# Allegro board F12-F018_MAIN_V1.brd
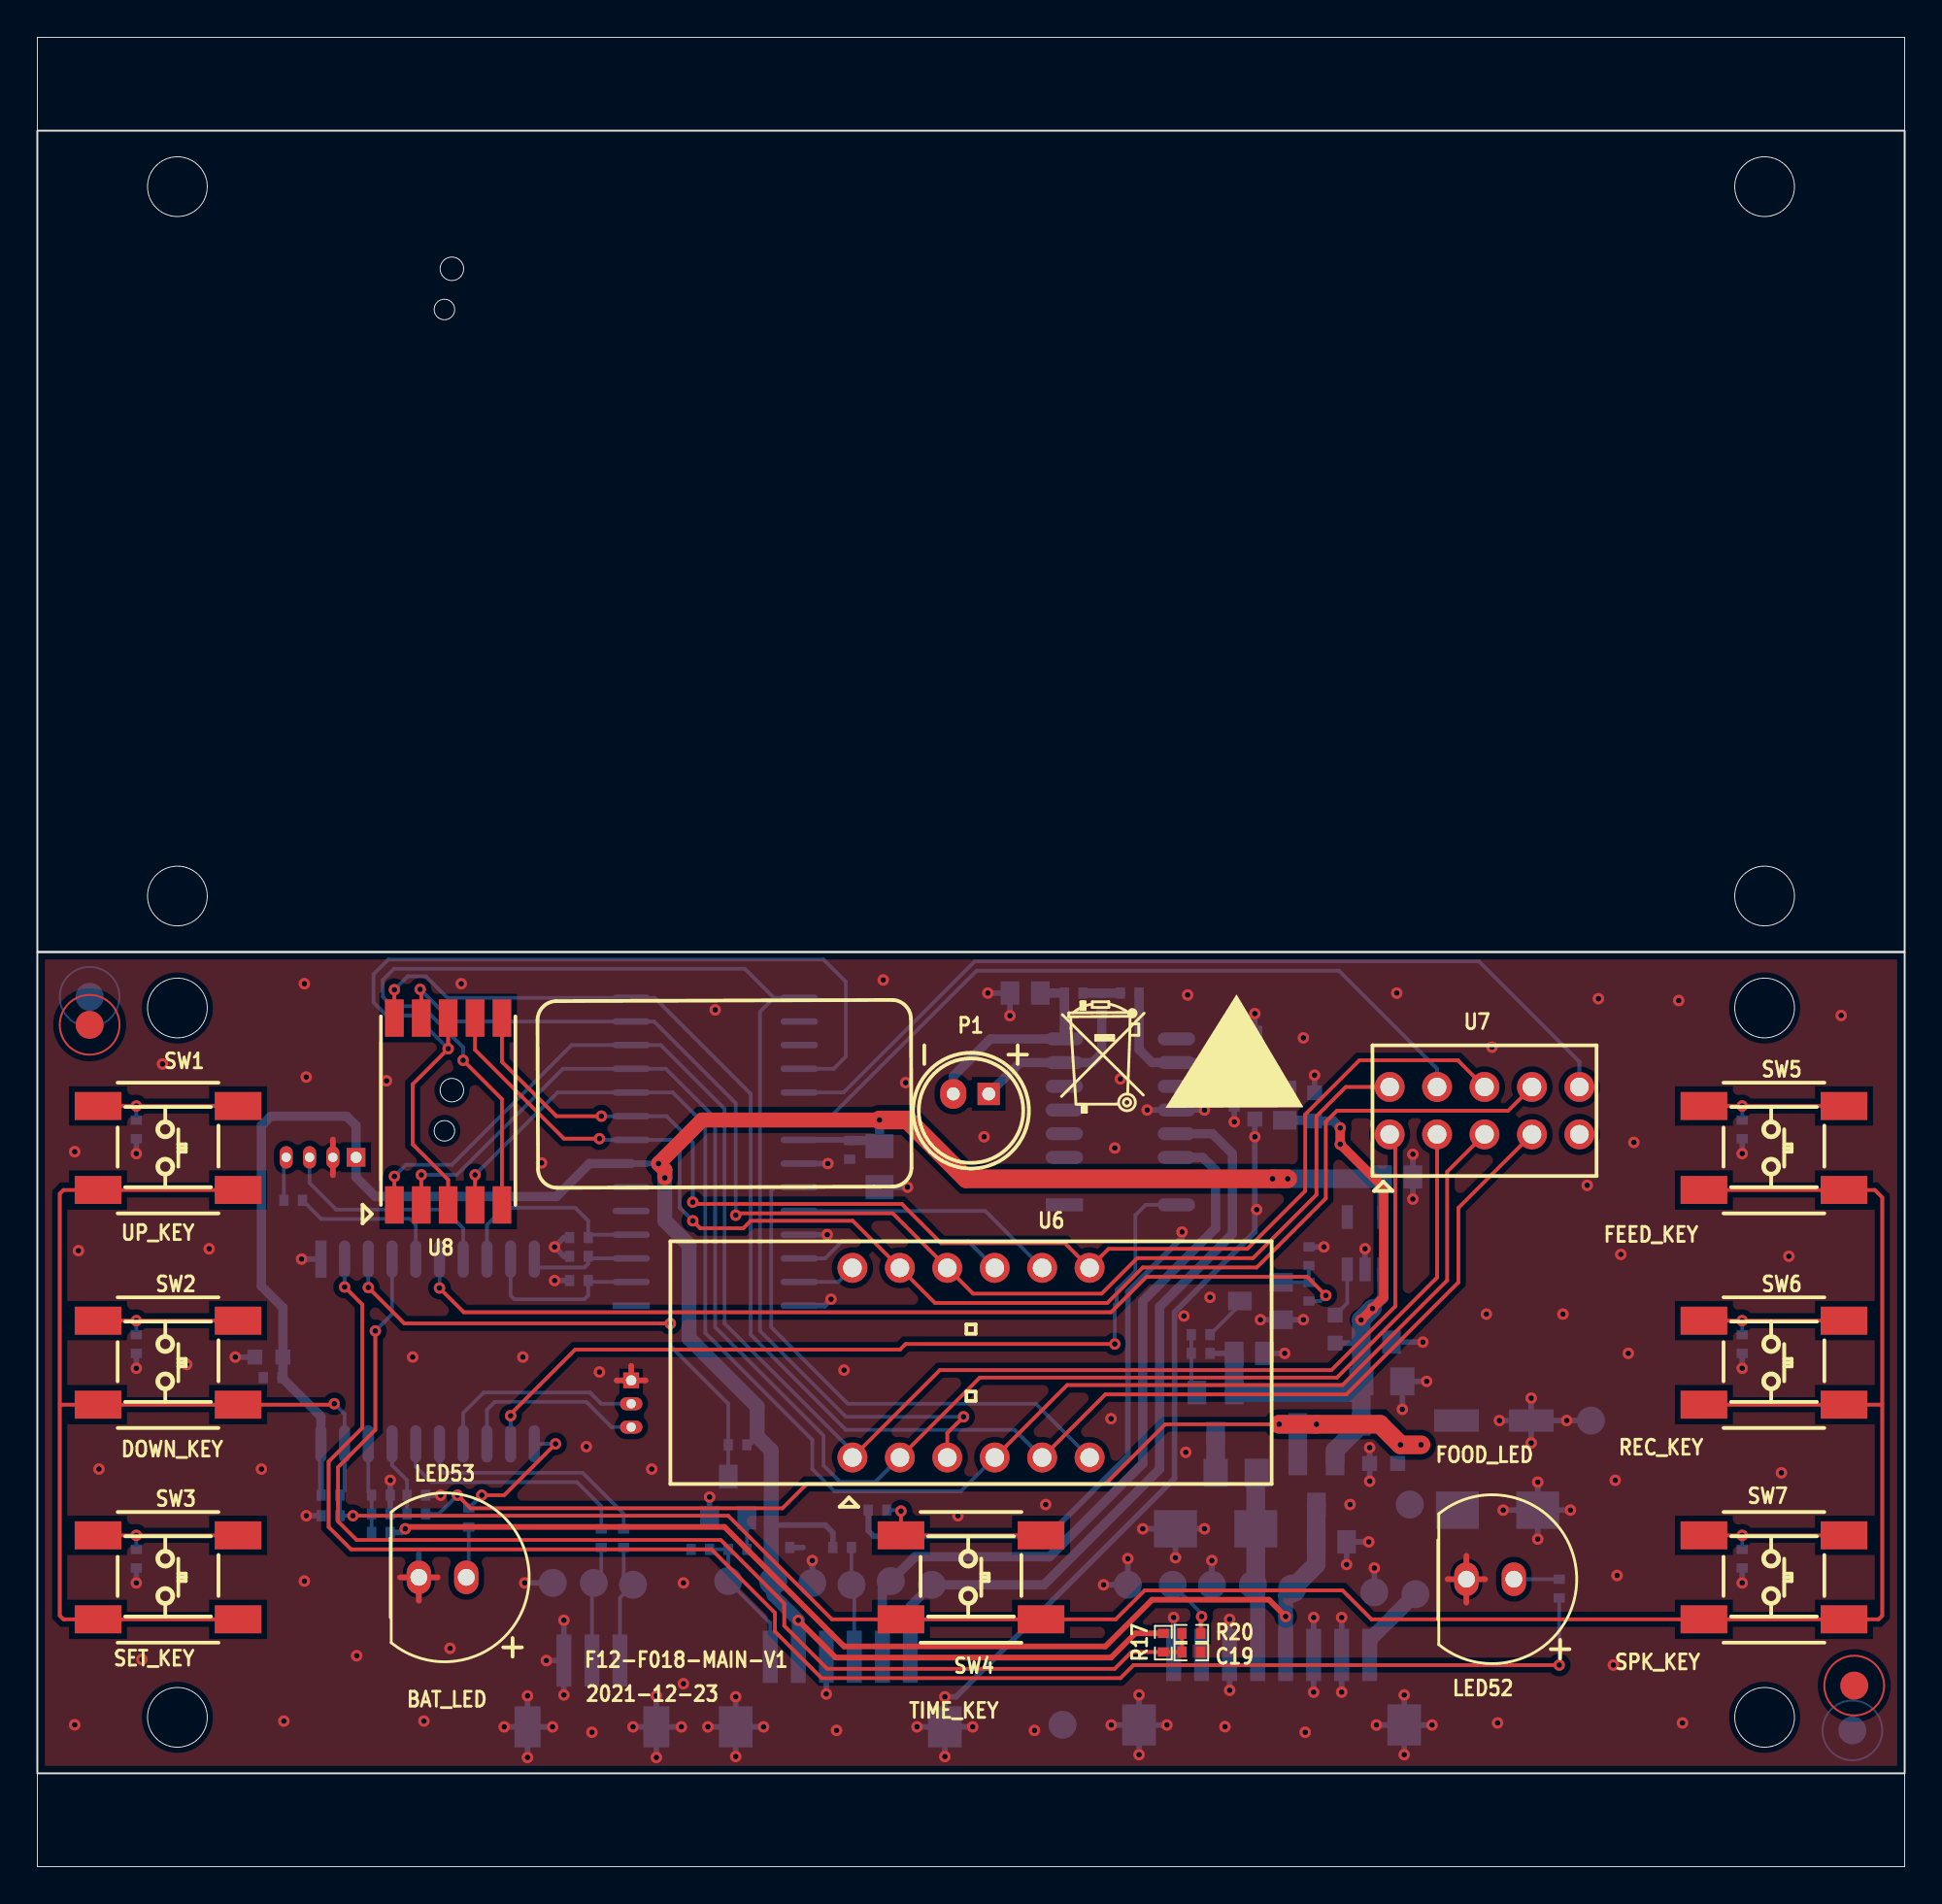
[diagram p0: board, top side]
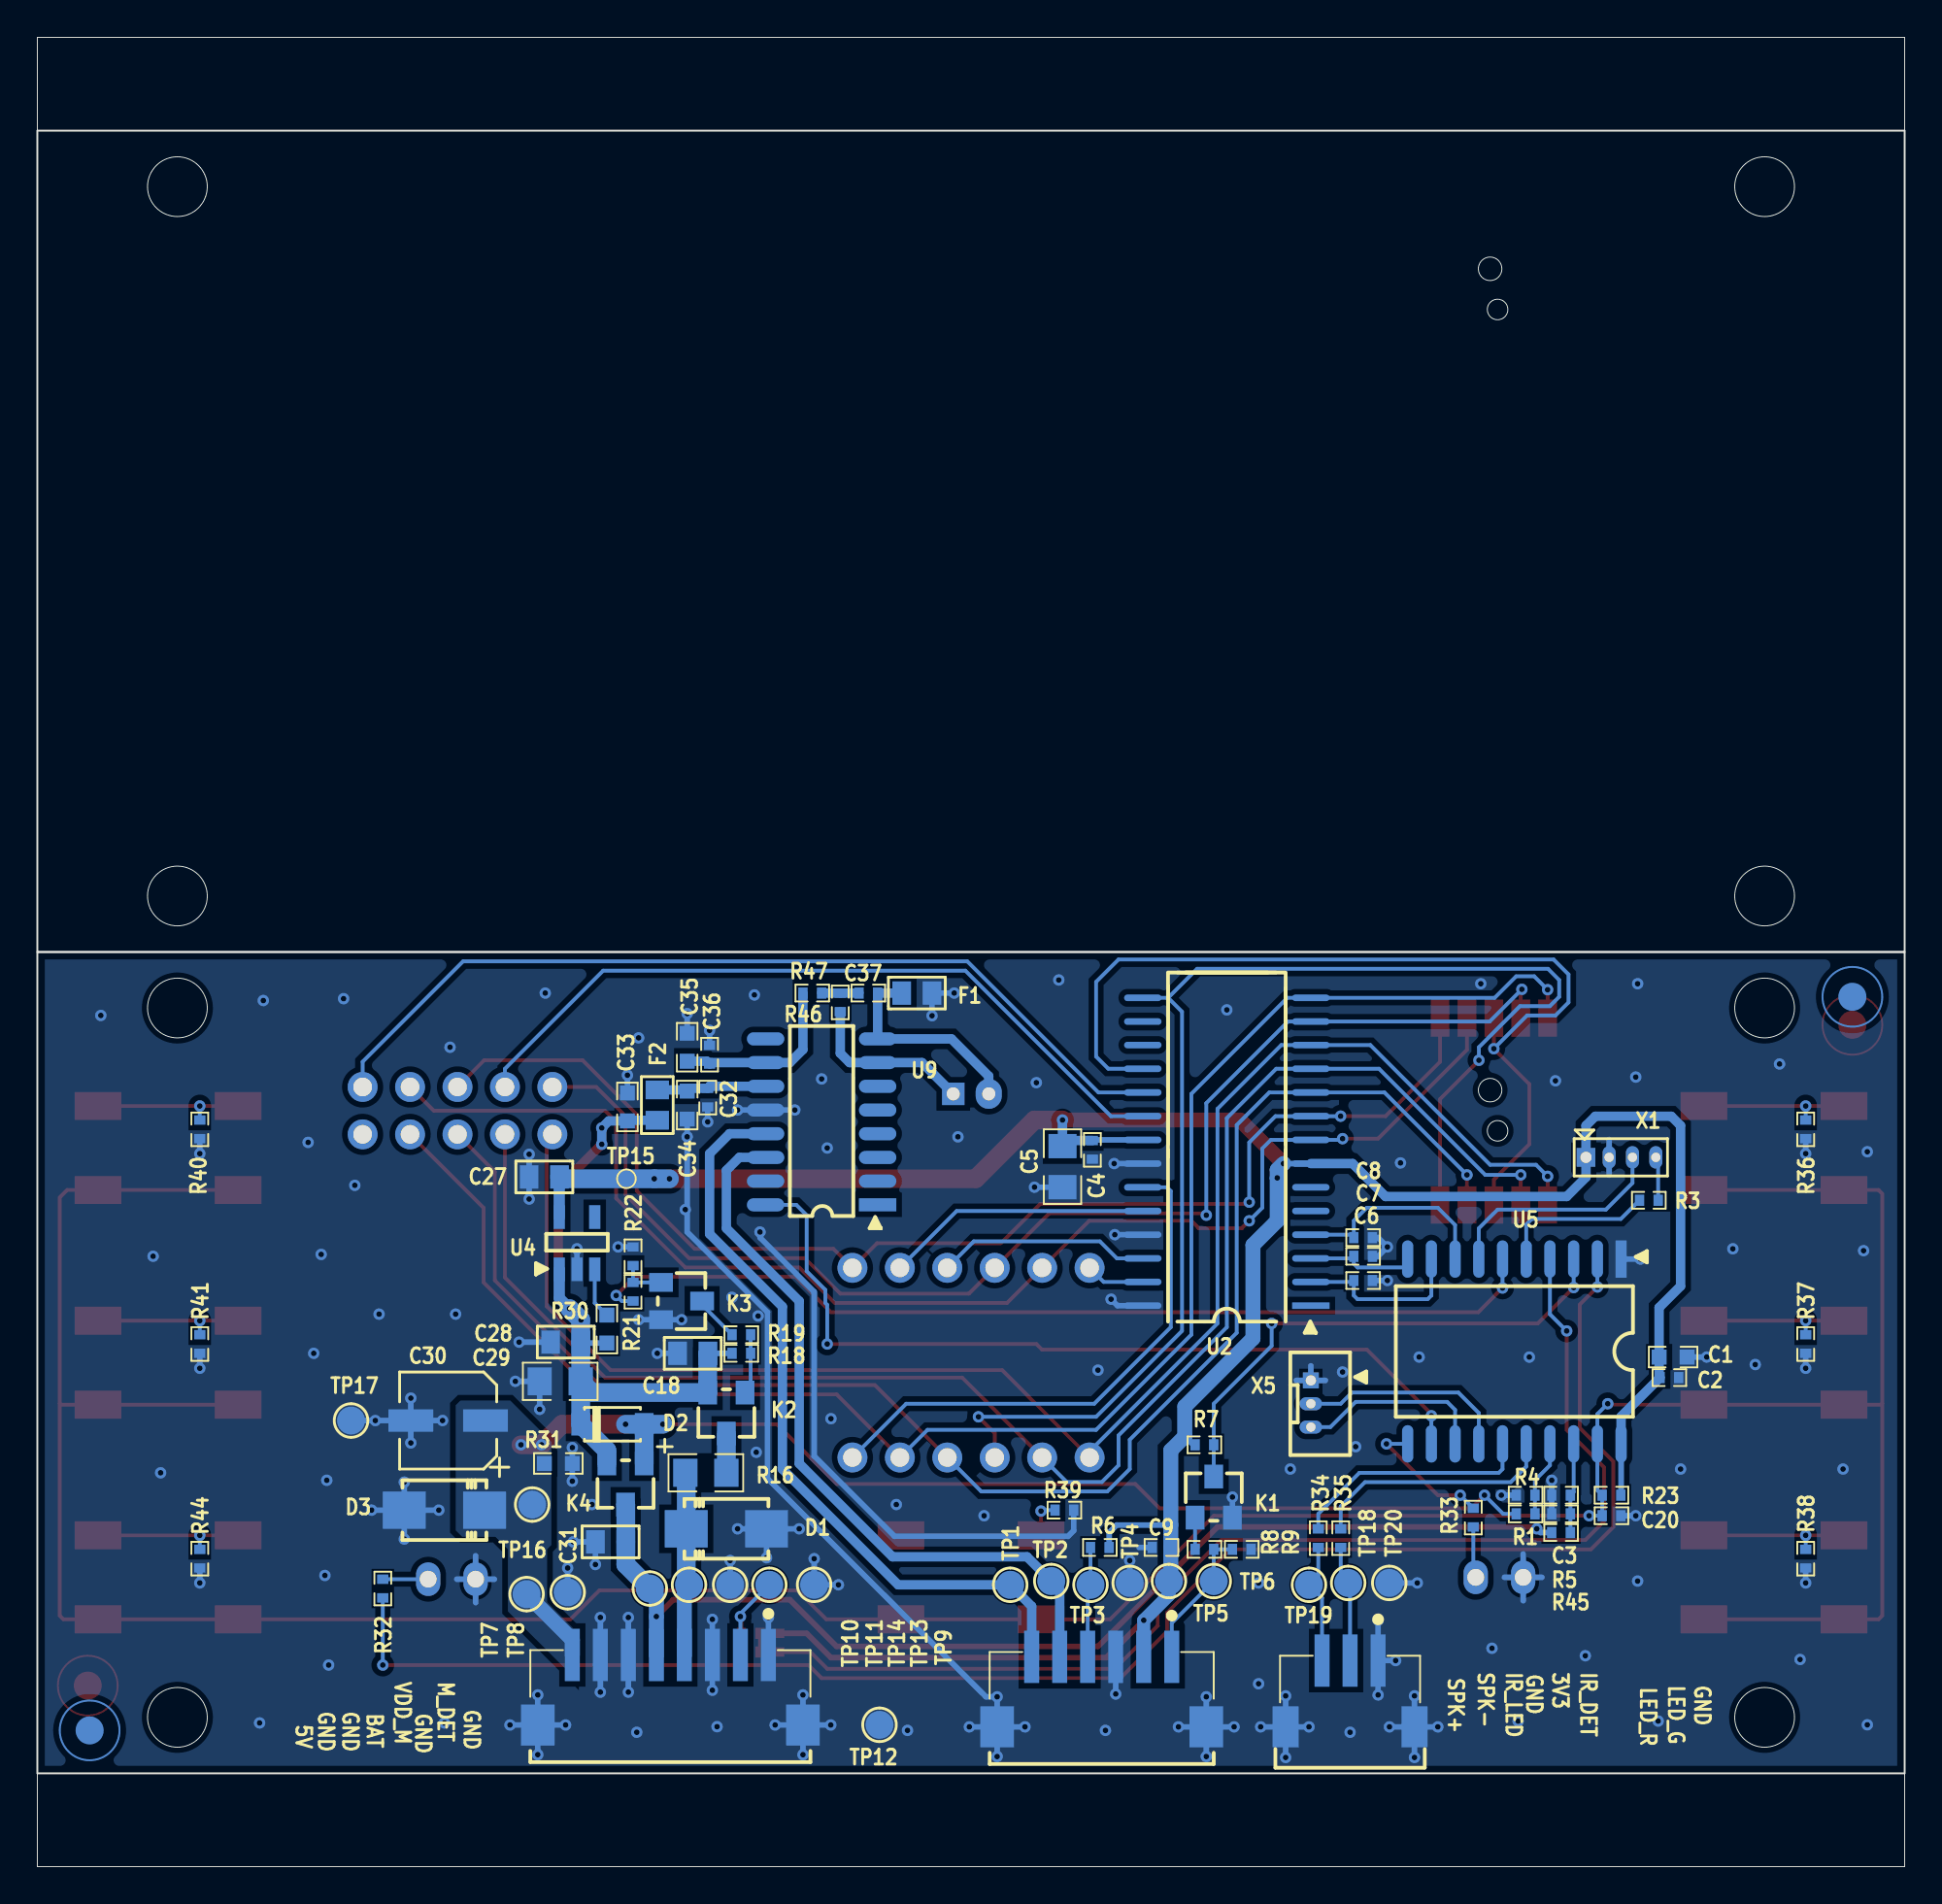
[diagram p1: board, bottom side, seen from below]

Outline 100 x 98 mm; copper layers: TOP, BOTTOM. Coordinates in mm from the lower left corner of the outline.
Outline path: rectangle 0,49 100,93 ; rectangle 0,5 100,49 ; circle c7.5,90 r1.6 ; circle c7.5,52 r1.6 ; circle c7.5,46 r1.6 ; circle c7.5,8 r1.6 ; circle c21.8,83.42 r0.55 ; circle c22.2,85.6 r0.63 ; circle c92.5,90 r1.6 ; circle c92.5,52 r1.6 ; circle c92.5,46 r1.6 ; circle c92.5,8 r1.6 ; 0,98 0,93 100,93 100,98 0,98 ; 0,5 0,0 100,0 100,5 0,5

## Placement (name value [footprint] x y rotation side)
C1  10uF_6.3V  [0603]  12.4 27.3 0 bottom
C2  0.1uF_10V  [0402]  12.6 26.2 0 bottom
C3  0.1uF_10V  [0402]  18.4 19.9 180 bottom
C4  0.1uF_10V  [0402]  43.5 38.4 90 bottom
C5  47uF_6.3V  [1206]  45.1 37.5 90 bottom
C6  0.1uF_10V  [0402]  29 31.4 0 bottom
C7  0.1uF_10V  [0402]  29 32.7 0 bottom
C8  0.1uF_10V  [0402]  29 33.7 0 bottom
C9  0.1uF_10V  [0402]  39.8 17.1 180 bottom
C18  NC/10uF_16V  [0805]  64.9 27.5 180 bottom
C19  0.1uF_10V  [0402]  61.8 11.5 180 top
C20  NC/0.1uF_10V  [0402]  15.7 18.8 0 bottom
C27  22uF_6.3V  [0805]  72.85 36.95 180 bottom
C28  22uF_6.3V  [0805]  71.7 28.1 180 bottom
C29  NC/22uF_10V  [1206]  72 26 180 bottom
C30  100uF_10V  [CPSM_5R00_5X5]  78 23.9 0 bottom
C31  22uF_10V  [0805]  69.3 17.4 180 bottom
C32  1uF_6.3V  [0402]  64.1 41.2 270 bottom
C33  10uF_6.3V  [0603]  68.4 40.7 270 bottom
C34  10uF_6.3V  [0603]  65.2 40.8 90 bottom
C35  10uF_6.3V  [0603]  65.2 43.9 270 bottom
C36  1uF_6.3V  [0402]  64 43.5 90 bottom
C37  1uF_6.3V  [0402]  55.5 46.8 180 bottom
D1  NC/SS14  [SMA_MBRA340]  63.1 18.1 0 bottom
D2  DS22W  [SOD_123LF]  69.2 23.7 0 bottom
D3  SMAJ7.5A  [SMA_MBRA340]  78.2 19.1 180 bottom
F1  1000R_0.8A  [0805]  52.9 46.8 0 bottom
F2  1000R_0.8A  [0805]  66.8 40.8 270 bottom
K1  MMBT3904_NL  [SOT23Q]  37 19.8 270 bottom
K2  SI2305-PMOS  [SOT23M]  63.1 24.3 90 bottom
K3  MMBT3904_NL  [SOT23Q]  65.5 30.3 0 bottom
K4  SI2305-PMOS  [SOT23M]  68.5 20.5 90 bottom
LED52  RED_F8  [LED_2R54_8]  77.8 15.4 180 top
LED53  Yellow_F8  [LED_2R54_8]  21.7 15.5 180 top
MK1  MARK  [MARK_PCB]  97.3 9.7 90 top
MK2  MARK  [MARK_PCB]  2.8 45.1 0 top
NOREF  -  []  64.1 43.7 0.2 top
NOREF#2  -  []  0 5 90 top
NOREF#3  -  []  36.8 41.4 0.2 top
NOREF#4  -  []  0 0 90 top
NOREF#5  -  []  0 0 0 top
NOREF#6  -  []  59.6 43.5 0.2 top
NOREF#7  -  [unnamed#2]  2.8 46.6 180 bottom
NOREF#8  -  [unnamed#2]  97.2 7.3 180 bottom
P1  -42dB_MIC_6027  [MICROPHONE_2L_1R90_6R0_N]  50 40.5 90 top
R1  510K  [0402]  20.3 18.9 0 bottom
R3  100R  [0402]  13.7 35.7 0 bottom
R4  1M  [0402]  20.3 19.9 180 bottom
R5  1M  [0402]  18.4 18.9 180 bottom
R6  1K  [0402]  43.1 17.1 0 bottom
R7  10K  [0402]  37.5 22.6 0 bottom
R8  1K  [0402]  37.5 17 0 bottom
R9  10K  [0402]  35.5 17 0 bottom
R16  1R5  [1206]  64.2 21.1 0 bottom
R17  10K  [0402]  60.3 12 90 top
R18  10K  [0402]  62.3 27.5 0 bottom
R19  1K  [0402]  62.3 28.5 180 bottom
R20  100R  [0402]  61.8 12.5 0 top
R21  1K  [0402]  68.1 30.8 270 bottom
R22  10K  [0402]  68.1 32.7 270 bottom
R23  10K  [0402]  15.7 19.9 0 bottom
R30  10K  [0603]  69.5 28.8 270 bottom
R31  470K  [0603]  72.1 21.6 0 bottom
R32  1K  [0402]  81.5 14.9 90 bottom
R33  1K  [0402]  23.1 18.7 270 bottom
R34  1K  [0402]  31.4 17.6 270 bottom
R35  1K  [0402]  30.2 17.6 270 bottom
R36  20K  [0402]  5.3 39.5 90 bottom
R37  33K  [0402]  5.3 28 270 bottom
R38  47K  [0402]  5.3 16.5 270 bottom
R39  56K  [0402]  45 19.1 180 bottom
R40  62K  [0402]  91.3 39.5 270 bottom
R41  75K  [0402]  91.3 28 270 bottom
R44  100K  [0402]  91.3 16.5 270 bottom
R45  510K  [0402]  18.4 17.9 0 bottom
R46  1K  [0402]  57 46.3 90 bottom
R47  NC/1K  [0402]  58.5 46.8 0 bottom
SW1  SW_Top_6R6x5R0  [SW4SM_6R6X6]  7 38.5 0 top
SW2  SW_Top_6R6x5R0  [SW4SM_6R6X6]  7 27 0 top
SW3  SW_Top_6R6x5R0  [SW4SM_6R6X6]  7 15.5 0 top
SW4  SW_Top_6R6x5R0  [SW4SM_6R6X6]  50 15.5 0 top
SW5  SW_Top_6R6x5R0  [SW4SM_6R6X6]  93 38.5 0 top
SW6  SW_Top_6R6x5R0  [SW4SM_6R6X6]  93 27 0 top
SW7  SW_Top_6R6x5R0  [SW4SM_6R6X6]  93 15.5 0 top
TP1  TP  [TP1R50]  47.9 15.1 180 bottom
TP2  TP  [TP1R50]  45.7 15.3 180 bottom
TP3  TP  [TP1R50]  43.6 15.1 180 bottom
TP4  TP  [TP1R50]  41.5 15.2 180 bottom
TP5  TP  [TP1R50]  39.4 15.3 180 bottom
TP6  TP  [TP1R50]  37 15.3 180 bottom
TP7  TP  [TP1R50]  73.8 14.6 180 bottom
TP8  TP  [TP1R50]  71.6 14.7 180 bottom
TP9  TP  [TP1R50]  58.4 15.1 180 bottom
TP10  TP  [TP1R50]  67.2 14.9 180 bottom
TP11  TP  [TP1R50]  65.1 15.1 180 bottom
TP12  TP  [TP1R50]  54.9 7.6 180 bottom
TP13  TP  [TP1R50]  60.8 15.1 180 bottom
TP14  TP  [TP1R50]  62.9 15.1 180 bottom
TP15  TP  [TP0R80]  68.45 36.85 180 bottom
TP16  TP  [TP1R50]  73.5 19.4 180 bottom
TP17  TP  [TP1R50]  83.2 23.9 180 bottom
TP18  TP  [TP1R50]  29.8 15.2 180 bottom
TP19  TP  [TP1R50]  31.9 15.1 180 bottom
TP20  TP  [TP1R50]  27.6 15.2 180 bottom
U2  TM1628A  [SOP28_1R27_9R00]  36.3 38.3 90 bottom
U4  LN1152A332MR  [SOT23_5L_0R95]  71.1 33.4 180 bottom
U5  HT66F018-SOP20  [SO20_10R30]  20.9 27.6 0 bottom
U6  -  [LH-3041-AW]  50 27 0 top
U7  -  [LH-2251-AW]  77.5 40.5 0 top
U8  -  [LH-2011SMD-AW]  22 40.5 0 top
U9  NVF04M  [SO16_6R00]  58 39.9 90 bottom
X1  NC/4pin_1R25_V  [CN4_1R25]  15.2 38 180 bottom
X2  3pin_1R5_H  [CN3SM_1R50]  31.2 8.3 0 bottom
X3  6pin_1R5_H  [CN6SM_1R50]  43 8.5 0 bottom
X4  8pin_1R5_H  [CN8SM_1R50]  66.1 8.6 0 bottom
X5  NC/3pin_1R25_V  [CN3S_1R25]  31.8 24.8 270 bottom

## Library data of the parts
C1-C9 C18-C20 C27-C29 C31-C37 = CAP
C30 = ELECTRO1
D1-D3 = DIODE
F1 F2 = FERRITE_BEAD
K1 K3 = NPN
K2 K4 = MOSFET_P
LED52 LED53 = LED
MK1 MK2 = MARK
P1 = MIC_6X5MM
R1 R3-R9 R16-R23 R30-R41 R44-R47 = RES
SW1-SW7 = SW_FTE-2C-V
TP1-TP20 = TP
U2 = TM1628A
U4 = FH6120M5
U5 = HT66F018-SOP20
U6 = LH-3041-AW
U7 = LH-2251-AW
U8 = LH-2011SMD-AW
U9 = NVF04M
X1 = CON4
X2 = CON3SM
X3 = CON6SM
X4 = CON8SM
X5 = CON3

## Footprints (pads in the part's own frame, mm; a bottom-side part is the same pattern mirrored in y, then rotated)
0402
  rect 0.5x0.6 smd: 1(-0.5,0) 2(0.5,0)
0603
  rect 0.8x0.8 smd: 1(-0.75,0) 2(0.75,0)
0805
  rect 1x1.25 smd: 1(-0.813,0) 2(0.813,0)
1206
  rect 1.3x1.5 smd: 1(-1.1,0) 2(1.1,0)
CN3S_1R25
  rect 0.85x0.85 hole 0.55: 1(-1.25,0)
  oval 0.7x1.2 hole 0.5: 2(0,0) 3(1.25,0)
CN3SM_1R50
  rect 0.8x2.799 smd: 1(-3,-2.741) 2(-1.501,-2.741) 3(0,-2.741)
  rect 1.4x2.2 smd: 4(1.95,0.81) 5(-4.95,0.81)
CN4_1R25
  rect 1x1 hole 0.6: 1(-1.865,0)
  oval 0.7x1.2 hole 0.5: 2(-0.625,0) 3(0.625,0) 4(1.875,0)
CN6SM_1R50
  rect 0.8x2.799 smd: 1(-3.75,-2.741) 2(-2.251,-2.741) 3(-0.75,-2.741) 4(0.751,-2.741) 5(2.25,-2.741) 6(3.75,-2.741)
  rect 1.8x2.2 smd: 7(5.6,1.01) 8(-5.6,1.01)
CN8SM_1R50
  rect 0.8x2.799 smd: 1(-5.25,-2.741) 2(-3.751,-2.741) 3(-2.25,-2.741) 4(-0.749,-2.741) 5(0.75,-2.741) 6(2.25,-2.741) 7(3.75,-2.741) 8(5.25,-2.741)
  rect 1.8x2.2 smd: 9(7.1,1.01) 10(-7.1,1.01)
CPSM_5R00_5X5
  rect 2.4x1.2 smd: 1(-2,0) 2(2,0)
LED_2R54_8
  oval 1.3x1.8 hole 0.9: 1(-1.27,0) 2(1.27,0)
LH-2011SMD-AW
  rect 1x2 smd: 1(-2.88,-5.05) 2(-1.44,-5.05) 3(0,-5.05) 4(1.44,-5.05) 5(2.88,-5.05) 6(2.88,4.96) 7(1.44,4.96) 8(0,4.96) 9(-1.44,4.96) 10(-2.88,4.96)
LH-2251-AW
  round 1.6 hole 1: 1(-5.08,-1.27) 2(-2.54,-1.27) 3(0,-1.27) 4(2.54,-1.27) 5(5.08,-1.27) 6(5.08,1.27) 7(2.54,1.27) 8(0,1.27) 9(-2.54,1.27) 10(-5.08,1.27)
LH-3041-AW
  round 1.6 hole 1: 1(-6.35,-5.08) 2(-3.81,-5.08) 3(-1.27,-5.08) 4(1.27,-5.08) 5(3.81,-5.08) 6(6.35,-5.08) 7(6.35,5.08) 8(3.81,5.08) 9(1.27,5.08) 10(-1.27,5.08) 11(-3.81,5.08) 12(-6.35,5.08)
MARK_PCB
  round 1.5 smd: 1(0,0)
MICROPHONE_2L_1R90_6R0_N
  rect 1.2x1.2 hole 0.7: 1(0.9,-0.95)
  oval 1.6x1.4 hole 0.7: 2(0.9,0.95)
SMA_MBRA340
  rect 2.3x2 smd: A(-2.15,0) K(2.15,0)
SO16_6R00
  rect 0.7x2 smd: 1(-4.445,-3)
  oval 0.7x2 smd: 2(-3.175,-3) 3(-1.905,-3) 4(-0.635,-3) 5(0.635,-3) 6(1.905,-3) 7(3.175,-3) 8(4.445,-3) 9(4.445,3) 10(3.175,3) 11(1.905,3) 12(0.635,3) 13(-0.635,3) 14(-1.905,3) 15(-3.175,3) 16(-4.445,3)
SO20_10R30
  rect 0.6x2 smd: 1(-5.715,-4.95)
  oval 0.6x2 smd: 2(-4.445,-4.95) 3(-3.175,-4.95) 4(-1.905,-4.95) 5(-0.635,-4.95) 6(0.635,-4.95) 7(1.905,-4.95) 8(3.175,-4.95) 9(4.445,-4.95) 10(5.715,-4.95) 11(5.715,4.95) 12(4.445,4.95) 13(3.175,4.95) 14(1.905,4.95) 15(0.635,4.95) 16(-0.635,4.95) 17(-1.905,4.95) 18(-3.175,4.95) 19(-4.445,4.95) 20(-5.715,4.95)
SOD_123LF
  rect 1x1.2 smd: A(-1.7,0) K(1.7,0)
SOP28_1R27_9R00
  rect 0.35x2 smd: 1(-8.245,-4.5)
  oval 0.35x2 smd: 2(-6.975,-4.5) 3(-5.715,-4.5) 4(-4.445,-4.5) 5(-3.175,-4.5) 6(-1.905,-4.5) 7(-0.635,-4.5) 8(0.635,-4.5) 9(1.905,-4.5) 10(3.175,-4.5) 11(4.445,-4.5) 12(5.715,-4.5) 13(6.975,-4.5) 14(8.245,-4.5) 15(8.245,4.5) 16(6.975,4.5) 17(5.715,4.5) 18(4.445,4.5) 19(3.175,4.5) 20(1.905,4.5) 21(0.635,4.5) 22(-0.635,4.5) 23(-1.905,4.5) 24(-3.175,4.5) 25(-4.445,4.5) 26(-5.715,4.5) 27(-6.975,4.5) 28(-8.245,4.5)
SOT23_5L_0R95
  rect 0.6x1.27 smd: 1(-0.95,-1.4) 2(0,-1.4) 3(0.95,-1.4) 4(0.95,1.4) 5(-0.95,1.4)
SOT23M
  rect 1.27x1 smd: D(-1.1,0) G(1.1,-1) S(1.1,1)
SOT23Q
  rect 1.27x1 smd: B(1.1,-1) C(-1.1,0) E(1.1,1)
SW4SM_6R6X6
  rect 2.5x1.5 smd: 1(3.75,-2.25) 2(-3.75,-2.25) 3(3.75,2.25) 4(-3.75,2.25)
TP0R80
  round 0.8 smd: 1(0,0)
TP1R50
  round 1.5 smd: 1(0,0)
unnamed#2
  round 1.5 smd: 1(0,0)

## Nets
AGND: C37.2 F1.2 P1.2(-) U9.8(AGND)
GND: C1.1 C2.1 C3.1 C4.1 C5.1 C6.1 C7.1 C8.1 C9.1 C18.1 C19.1 C20.1 C27.1 C28.1 C29.1 C30.2 C31.1 C32.2 C33.1 C34.1 C35.1 C36.2 D1.A D3.A F1.1 K1.E K3.E LED52.2 LED53.2 R4.1 R5.1 R9.1 R22.1 R31.1 R36.1 R37.2 R38.2 R39.2 R40.2 R41.2 R44.2 TP4.1 TP8.1 TP9.1 TP12.1 TP14.1 TP17.1 TP20.1 U2.22(GND2#22) U2.25(GND2#25) U2.28(GND) U4.2(GND) U5.1(VSS) U9.12(GND) X1.2 X2.1 X2.4 X2.5 X3.3 X3.7 X3.8 X4.1 X4.3 X4.6 X4.7 X4.9 X4.10 X5.1
VDD_5VDC: C30.1 D2.A D3.K K4.G R1.2 R31.2 TP7.1 TP16.1 X4.8
VDD_BAT: C31.2 K4.D R45.2 TP10.1 X4.5
VDD_MOTOR: D1.K R16.2 TP11.1 X4.4
VDD_SEL: C18.2 C28.2 C29.2 C33.2 D2.K F2.2 K2.S K4.S R18.2 R30.2 U4.1(IN)
ADC_KEY: C20.2 R23.2 SW1.1 SW1.2 SW2.1 SW2.2 SW3.1 SW3.2 SW4.1 SW4.2 SW5.1 SW5.2 SW6.1 SW6.2 SW7.1 SW7.2 U5.19(PB0/INT0/AN0/XT1)
BAT_DET: C3.2 R5.2 R45.1 U5.18(PB1/INT1/AN1/XT2)
CLK: C7.2 U2.3(CLK) U5.10(PB5/C-)
DC_DET: R1.1 R4.2 U5.17(PB2/TCK0/AN2)
DIO: C6.2 U2.2(DIO) U5.9(PB6/C+)
DSCK: U5.7(PA2/ICPCK/OCDSCK) X1.3
DSDA: R3.2 U5.5(PA0/TP0/ICPDA/OCDSDA)
F8_R_LED: R32.1 U5.2(PC0/OSC1)
F8_Y_LED: R33.1 U5.11(PB4/CLO)
GRID1: U2.27(GRID1) U6.12(DIG1)
GRID2: U2.26(GRID2) U6.9(DIG2)
GRID3: U2.24(GRID3) U6.8(DIG3)
GRID4: U2.23(GRID4) U6.6(DIG4)
GRID5: U2.20(GRID5/SEG14) U7.9(DIG1)
GRID6: U2.19(GRID6/SEG13) U7.6(DIG2)
GRID7: U2.18(GRID7/SEG12) U8.3(DIG1) U8.8(DIG2)
IR_DET: K1.C R7.1 U5.3(PC1/OSC2)
IRDA: U5.12(PB3/TP2/AN7) U9.16(PA9/PA11)
LDO_3V3: C1.2 C2.2 C4.2 C5.2 C9.2 C27.2 R6.1 R7.2 R17.2 R23.1 TP5.1 TP15.1 U2.7(VDD) U2.21(VDD2) U4.5(OUT) U5.20(VDD) X1.1 X3.2
LED_G: R35.1 U5.16(PA4/TCK1/AN3)
LED_R: R34.1 U5.15(PA5/AN4/VREF)
MIC+: P1.1(+) R46.1 U9.7(PB1)
MOTOR_DET: C19.2 R17.1 R20.1 U5.4(PC2)
MOTOR_DRIVER: R21.2 U5.6(PA1)
RXD: U5.13(PA7/TP1/AN6) X5.3
SEG1: U2.8(SEG1/KS1) U6.11(A) U7.7(A) U8.7(A)
SEG2: U2.9(SEG2/KS2) U6.7(B) U7.8(B) U8.6(B)
SEG3: U2.10(SEG3/KS3) U6.4(C) U7.3(C) U8.4(C)
SEG4: U2.11(SEG4/KS4) U6.2(D) U7.2(D) U8.2(D)
SEG5: U2.12(SEG5KS5) U6.1(E) U7.1(E) U8.1(E)
SEG6: U2.13(SEG6/KS6) U6.10(F) U7.10(F) U8.9(F)
SEG7: U2.14(SEG7/KS7) U6.5(G) U7.4(G) U8.10(G)
SEG8: U2.15(KS8/SEG8) U6.3(DP) U8.5(DP)
SPK+: TP1.1 U9.13(DACPO) X3.6
SPK-: TP2.1 U9.14(DACNO) X3.5
STB: C8.2 U2.4(STB) U5.8(PA3/CX)
TXD: U5.14(PA6/TCK2/AN5) X5.2
VOUT_3V3: C35.2 C36.1 R47.2 U9.10(VDDIO)
N17327339: R36.2 SW1.3 SW1.4
N17337672: R30.1 U4.3(EN)
N17354367: R20.2 TP13.1 X4.2
N17360659: R37.1 SW2.3 SW2.4
N17360860: R38.1 SW3.3 SW3.4
N17361075: R39.1 SW4.3 SW4.4
N17361306: R40.1 SW5.3 SW5.4
N17361550: R41.1 SW6.3 SW6.4
N17361802: R44.1 SW7.3 SW7.4
N17363842: K2.G R18.1 R19.2
N17363844: K3.C R19.1
N17363852: K2.D R16.1
N17363856: K3.B R21.1 R22.2
N17376750: R3.1 X1.4
N17379186: R34.2 TP19.1 X2.3
N17379194: R35.2 TP18.1 X2.2
N17379605: LED52.1 R32.2
N17379623: LED53.1 R33.2
N17382684: K1.B R8.2
N17382715: R8.1 R9.2 TP6.1 X3.1
N17382789: R6.2 TP3.1 X3.4
N17383671: C32.1 C34.2 F2.1 U9.11(VBAT)
N17392841: C37.1 R46.2 R47.1

Pads without a net: MK1 1; MK2 1; NOREF#7 1; NOREF#8 1; U2 1 5 6 16 17; U4 4; U7 5; U9 1 2 3 4 5 6 9 15

## Via types
v1: diameter 0.61, hole 0.305, TOP to BOTTOM, 211 vias

## Routing (per net, layer and track width the routed paths; a pad name or vN(x,y) marks a point on that pad's centre or on a via; arc(x,y) is an arc through that point)
AGND: length 11.5
  BOTTOM w0.5: F1.2 C37.2 U9.8 51.05,44.34 49.05,42.35 P1.2
GND: length 224.3
  TOP w0.3: 75.53,15.4 LED52.2 ; LED52.2 77.53,15.4 ; LED52.2 76.53,16.65 ; LED52.2 76.53,14.15 ; 20.43,14.25 LED53.2 ; LED53.2 19.43,15.5 ; LED53.2 21.43,15.5 ; 15.82,37.05 X1.2 15.82,38.95 ; X5.1 32.58,26.05 ; X5.1 31.8,26.83 ; X5.1 31.02,26.05
  BOTTOM w0.3: 40.8,33.86 v1(42.3,33.86) ; v1(65.5,29.3) K3.E v1(67.8,29.3) ; R4.1 v1(21.6,19.9) ; X5.1 32.58,26.05 ; X5.1 31.02,26.05 ; X5.1 31.8,26.83 ; v1(71.3,17.4) C31.1 v1(70.11,16.19) ; 76.53,14.15 LED52.2 ; LED52.2 76.53,16.65 ; LED52.2 77.53,15.4 ; LED52.2 75.53,15.4 ; v1(69.85,13.35) X4.7 v1(69.85,9.35) ; X4.9 v1(74.69,7.59) ; X4.9 v1(71.71,7.59) ; X4.9 v1(73.2,6) ; X4.9 v1(73.2,9.2) ; v1(58.4,16.5) TP9.1 v1(57.1,15.1) ; LED53.2 21.43,15.5 ; LED53.2 19.43,15.5 ; LED53.2 20.43,14.25 ; LED53.2 20.43,16.75 ; TP17.1 v1(81.9,23.9) C30.2 ; C9.1 41,17.1 ; R37.2 v1(5.3,26.7) ; X2.4 v1(34.49,7.49) ; X2.4 v1(31.9,7.49) ; X2.4 v1(33.15,5.85) ; X2.4 v1(33.15,9.15) ; X2.5 v1(27.59,7.49) ; X2.5 v1(26.25,9.15) ; X2.5 v1(26.25,5.85) ; X2.5 v1(25,7.49) ; TP14.1 v1(62.9,16.4) ; D1.A v1(60.95,16.55) ; D1.A v1(62.5,18.1) ; D1.A v1(59.2,18.1) ; D3.A v1(82.1,19.1) ; D3.A v1(80.35,20.6) ; D3.A v1(80.35,17.55) ; D3.A v1(78.5,19.1) ; v1(71.35,22.45) R31.1 v1(71.35,20.65) ; X4.10 v1(60.49,7.59) ; X4.10 v1(57.51,7.59) ; X4.10 v1(59,6) ; X4.10 v1(59,9.2) ; C28.1 v1(74.2,28.1) ; C35.1 v1(65.2,45.7) ; C20.1 v1(14.4,18.8) ; v1(62.5,40.53) U9.12 v1(59.44,40.53) ; U2.22 v1(42.34,37.66) ; R5.1 C3.1 v1(18.9,20.7) ; v1(52.09,45.59) 52.09,46.8 v1(50.9,46.8) ; R40.2 v1(91.3,38.2) ; v1(61.3,34) 61.3,33.7 58.4,30.8 58.4,22 54.1,17.7 44.8,17.7 44.5,18 R39.2 ; X2.1 v1(27.26,11.04) ; X2.1 v1(28.2,9.2) ; X2.1 v1(28.2,13.2) ; TP4.1 v1(41.5,16.4) ; X3.7 v1(50.09,7.49) ; X3.7 v1(48.6,9.1) 49.2,9.1 60.9,20.8 60.9,29.7 65.2,34 v1(65.2,39.1) C34.1 ; X3.7 v1(47.11,7.49) ; X3.7 v1(48.6,5.9) ; C8.1 28.2,33.7 v1(27.7,33.2) 28.2,32.7 C7.1 ; X3.3 v1(42.25,9.25) ; R22.1 v1(68.9,33.2) ; C33.1 v1(68.4,42.4) ; C36.2 v1(64,44.8) ; U5.1 v1(14.15,32.55) ; v1(63.85,9.45) X4.3 v1(63.85,13.25) ; v1(68.35,13.35) X4.6 v1(68.35,9.35) ; X3.8 v1(38.89,7.49) ; X3.8 v1(37.4,5.9) ; X3.8 v1(37.4,9.1) ; X3.8 v1(35.91,7.49) ; v1(73.66,35.76) C27.1 v1(73.66,38.16) ; C6.1 v1(27.7,31.4) ; v1(74.4,26) C29.1 v1(73.1,24.5) ; U2.28 42.16,30.05 v1(42.5,30.4) ; C30.2 v1(80,25.1) ; C30.2 v1(78.3,23.9) ; C30.2 v1(80,22.7) ; TP8.1 v1(71.6,16) ; 15.82,38.95 X1.2 15.82,37.05 ; K1.E v1(36,19.8) ; R38.2 v1(5.3,15.2) ; R36.1 v1(5.3,38.2) ; C1.1 v1(10.6,27.3) ; TP20.1 v1(26.1,15.2) ; R41.2 v1(91.3,26.7) ; C5.1 v1(46.6,36.4) ; X4.1 v1(60.85,13.35) ; R44.2 v1(91.3,15.2) ; 65.71,27.5 v1(66.8,27.5) ; U4.2 v1(71.1,33.1) ; C32.2 v1(64.1,39.9)
  vias: v1(2,38.3) v1(2,7.6) v1(2.2,33) v1(3.3,21.3) v1(5.6,11.1) v1(6.7,43) v1(8,26.9) v1(9.2,33.1) v1(12,21.3) v1(13.2,7.8) v1(14.3,47.3) v1(14.3,15.3) v1(14.4,42.3) v1(17.1,11.3) v1(18.7,42.1) v1(20.1,27.3) v1(20.7,7.8) v1(22.1,11.7) v1(22.7,47.3) v1(26,27.3) v1(27,37.7) v1(29.4,22.5) v1(29.7,7.2) v1(30.1,26.5) v1(32.9,21.3) v1(34.6,15.2) v1(34.6,9.8) v1(36.3,45.9) v1(42.8,7.3) v1(43.2,26.6) v1(45.3,47.5) v1(46.5,42) v1(49.3,18.8) v1(50.7,39.1) v1(53.4,7.3) v1(54,19.4) v1(57.5,24) v1(57.7,38.5) v1(58,42.2) v1(61.4,29.5) v1(61.5,22.2) v1(61.6,46.7) v1(62.8,30.5) v1(63.6,7.5) v1(65.3,35.2) v1(67.8,44.4) v1(67.9,7.2) v1(70.3,19.4) v1(72.8,46.8) v1(77.6,29.6) v1(77.9,43.9) v1(78.2,7.7) v1(81.7,29.6) v1(83,36.5) v1(83.6,46.5) v1(84.4,10.8) v1(84.5,20.7) v1(84.6,15.6) v1(84.8,32.8) v1(85.2,27.5) v1(85.5,38.8) v1(87.9,46.4) v1(88.1,7.7) v1(93.4,21.1) v1(93.8,32.7) v1(96.6,45.6)
VDD_5VDC: length 64.7
  TOP w0.2: v1(22.5,19.9) 23.2,19.2 39.9,19.2 41.2,20.5 57.2,20.5 60.4,23.7 v1(66.5,23.7)
  TOP w1: v1(74.1,22.6) v1(73,22.6) 71.9,23.7 v1(68.5,23.7) v1(66.5,23.7)
  BOTTOM w0.2: R1.2 21.5,18.9 v1(22.5,19.9)
  BOTTOM w0.8: TP7.1 71.35,12.15 X4.8
  BOTTOM w1: v1(68.5,23.7) D2.A ; D2.A K4.G ; D2.A v1(66.5,23.7)
VDD_BAT: length 60.9
  TOP w0.3: v1(66.85,13.4) 65.95,14.3 59.7,14.3 57.2,11.8 43.2,11.8 36.8,18.2 19.8,18.2 v1(19.7,18.1)
  BOTTOM w0.3: R45.2 19.5,17.9 v1(19.7,18.1)
  BOTTOM w0.8: X4.5 v1(66.85,13.4) 66.85,14.55 TP10.1
  BOTTOM w1: K4.D 68.49,19.39 C31.2 68.49,16.19 TP10.1
VDD_MOTOR: length 9.9
  BOTTOM w0.8: X4.4 65.35,14.85 TP11.1
  BOTTOM w1: R16.2 65.25,21.05 D1.K 65.25,15.25 TP11.1
VDD_SEL: length 40.3
  TOP w0.5: v1(70.89,29.29) v1(71.5,29.9) 72.1,30.5 72.1,36.38 v1(69.78,38.7) v1(69.78,39.58)
  BOTTOM w0.3: R18.2 C18.2 ; R30.2 70.84,28.05 C28.2
  BOTTOM w0.5: 66.8,39.99 68.36,39.99 C33.2 69.4,39.95 v1(69.78,39.58) v1(69.78,38.7)
  BOTTOM w0.6: C28.2 v1(70.89,29.29) 70.9,29.3 ; U4.1 72.05,30.45 v1(71.5,29.9)
  BOTTOM w1: C29.2 D2.K 69.5,22.3 K4.S ; C29.2 70.3,25.4 K2.S 64.1,27.49 C18.2 ; C29.2 70.9,28.09 ; 70.9,28.09 70.9,29.3 v1(71.5,29.9) ; 70.9,28.09 C28.2
ADC_KEY: length 190.9
  TOP w0.2: 98.8,24.8 98.8,13.45 98.6,13.25 SW7.1 SW7.2 71.45,13.25 69.9,14.8 59.3,14.8 57.75,13.25 SW4.1 SW4.2 42.55,13.25 37,18.8 v1(16.9,18.8) ; 98.8,24.8 98.8,35.85 98.4,36.25 SW5.1 SW5.2 ; 98.8,24.8 98.75,24.75 SW6.1 SW6.2 ; 1.2,24.8 1.2,36.05 1.4,36.25 SW1.2 SW1.1 ; 1.2,24.8 1.2,13.45 1.4,13.25 SW3.2 SW3.1 ; 1.2,24.8 1.25,24.75 SW2.2 SW2.1 15.85,24.75 v1(15.9,24.8)
  BOTTOM w0.2: v1(16.9,18.8) C20.2 R23.2 16.45,20.16 U5.19 16.45,24.25 v1(15.9,24.8)
BAT_DET: length 4.8
  BOTTOM w0.2: U5.18 17.73,20.07 C3.2 R5.2 R45.1
CLK: length 6
  BOTTOM w0.2: U2.3 29.61,32.59 C7.2 29.5,32.3 29.3,32.1 26.82,32.1 26.61,32.3 U5.10
DC_DET: length 4.1
  BOTTOM w0.2: R1.1 R4.2 19.8,20.7 19,21.5 19,22.65
DIO: length 9.4
  BOTTOM w0.2: U2.2 29.57,31.32 C6.2 29.5,30.6 29.3,30.4 25.55,30.4 25.34,30.6 U5.9
DSCK: length 12.3
  BOTTOM w0.2: X1.3 14.57,36.62 16,35.2 21.8,35.2 22.8,34.2 U5.7
DSDA: length 8.5
  BOTTOM w0.2: U5.5 20.27,34.4 19.96,34.7 15.2,34.7 R3.2
F8_R_LED: length 89.2
  TOP w0.2: v1(16.45,31.05) 17.4,30.11 17.4,23.5 15.6,21.7 15.6,18.2 16.8,17 36.1,17 39.5,13.6 39.5,12.6 42,10.1 58,10.1 58.7,10.8 v1(81.5,10.8)
  BOTTOM w0.2: U5.2 v1(16.45,31.05) ; R32.1 v1(81.5,10.8)
F8_Y_LED: length 7.2
  TOP w0.2: v1(23.8,19.9) 25,19.9 v1(27.75,22.65)
  BOTTOM w0.2: U5.11 v1(27.75,22.65) ; R33.1 v1(23.8,19.9)
GRID1: length 3.2
  BOTTOM w0.2: U6.12 42.9,31.32 U2.27
GRID2: length 11.4
  BOTTOM w0.2: U2.26 42.19,32.59 43.1,33.5 49.85,33.5 U6.9
GRID3: length 14.3
  BOTTOM w0.2: U2.24 50.77,35.12 U6.8
GRID4: length 28.8
  BOTTOM w0.2: 40.8,36.39 39.5,36.39 39.3,36.19 39.3,28.9 43.4,24.8 53.47,24.8 U6.6
GRID5: length 40.5
  BOTTOM w0.2: U2.20 42.51,40.2 50.3,48 69.7,48 74.96,42.74 U7.9
GRID6: length 48.3
  BOTTOM w0.2: U7.6 82.58,43.12 77.2,48.5 50.2,48.5 43.17,41.48 40.8,41.48
GRID7: length 51
  TOP w0.2: U8.3 22,36.8 20.1,38.7 20.1,41.92 v1(22,43.82) U8.8
  BOTTOM w0.2: U2.18 42.65,42.74 43.3,43.4 43.3,47.4 42.1,48.6 18.8,48.6 18,47.8 18,46.3 18.7,45.6 20.22,45.6 v1(22,43.82)
IR_DET: length 28
  TOP w0.2: v1(17.73,31.02) 19.65,29.1 v1(33.9,29.1)
  BOTTOM w0.2: U5.3 v1(17.73,31.02) ; K1.C R7.1 37,24.8 33.9,27.9 v1(33.9,29.1)
IRDA: length 45.3
  TOP w0.2: v1(57.7,28) 46.5,28 46.2,27.7 28.8,27.7 25.34,24.25 v1(25.34,24.16)
  BOTTOM w0.2: v1(57.7,28) 57.7,30.1 57.8,30.2 57.8,30.9 58.8,31.9 58.8,34.9 59.36,35.45 U9.16 ; U5.12 v1(25.34,24.16)
LDO_3V3: length 153
  TOP w0.3: v1(40.75,13.2) 42.75,11.2 57.5,11.2 58.8,12.5 R17.2
  TOP w0.8: v1(33.6,36.9) 33.6,37.33 v1(33.27,37.66) 35.6,40 v1(45.1,40)
  TOP w1: v1(66.96,36.85) v1(66.15,36.85) 49.75,36.85 46.6,40 v1(45.1,40)
  BOTTOM w0.3: 40.8,38.94 43.47,38.94 C4.2 ; 38.55,23.05 38.1,22.6 R7.2 ; R23.1 15.19,19.91 U5.20 ; 39.3,18.3 42.2,18.3 42.6,17.9 R6.1 ; U2.7 v1(33.27,37.66)
  BOTTOM w0.5: v1(45.1,40) C5.2 44.8,38.9 C4.2 ; U2.7 29.56,37.66 27.8,35.9 18.1,35.9 17.07,36.94 X1.1 17.07,39.7 16.57,40.2 12.5,40.2 12,39.7 12,31.1 13.15,29.95 C1.2 13.15,26.25 C2.2 15.19,24.11 U5.20
  BOTTOM w0.6: 71.94,36.85 72.05,36.74 U4.5
  BOTTOM w0.7: X3.2 v1(40.75,13.2) 39.4,14.55 TP5.1
  BOTTOM w0.8: TP5.1 39.3,15.4 C9.2 39.3,22.3 38.55,23.05 38.55,24.65 34.9,28.3 34.9,33.3 33.6,34.6 v1(33.6,36.9) 33.6,36.9 33.6,37.33 v1(33.27,37.66)
  BOTTOM w1: v1(66.15,36.85) v1(66.96,36.85) TP15.1 71.94,36.85 C27.2
LED_G: length 13.2
  BOTTOM w0.2: R35.1 30.2,19.3 28.9,20.6 21.1,20.6 20.27,21.43 U5.16
LED_R: length 13
  BOTTOM w0.2: R34.1 31.4,18.9 29.2,21.1 21.73,21.1 21.54,21.3 U5.15
MIC+: length 9.2
  BOTTOM w0.5: P1.1 52.62,43.08 56.5,43.08 57,43.58 R46.1
MOTOR_DET: length 65.8
  TOP w0.2: R20.1 C19.2 R17.1 58.6,11.5 57.7,10.6 42.3,10.6 40,12.9 40,14.1 36.6,17.5 17.1,17.5 16.1,18.5 16.1,21.4 18.1,23.4 v1(18.1,28.7)
  BOTTOM w0.2: 19,32.55 19,29.59 v1(18.1,28.7)
MOTOR_DRIVER: length 51.8
  TOP w0.2: v1(69,30.6) 68,31.6 59.4,31.6 57.5,29.7 22.84,29.7 v1(21.54,31)
  BOTTOM w0.2: U5.6 v1(21.54,31) ; v1(69,30.6) 68.7,30.3 R21.2
RXD: length 10.3
  BOTTOM w0.2: X5.3 30.75,23.55 29.4,24.9 24.5,24.9 24.07,24.48 U5.13
SEG1: length 73.3
  TOP w0.2: v1(30.1,39) 28.2,39 23.44,43.76 U8.7 ; U7.7 78.77,40.5 69.6,40.5 69,39.9 69,35.8 65.3,32.1 59.2,32.1 57.3,30.2 48.07,30.2 U6.11 43.67,34.6 38.2,34.6 37.8,34.2 35.5,34.2 v1(35.1,34.6)
  BOTTOM w0.2: v1(30.1,39) 30.16,38.94 33.94,38.94 34.4,38.47 34.4,35.3 v1(35.1,34.6)
SEG2: length 69
  TOP w0.2: U7.8 76.07,43.2 70.8,43.2 67.9,40.3 67.9,36.2 64.8,33.1 57.37,33.1 U6.7 55.03,33.4 48.4,33.4 46.3,35.5 35.2,35.5 v1(35.1,35.6) ; U8.6 24.88,43.12 27.8,40.2 v1(30.2,40.2)
  BOTTOM w0.2: v1(30.2,40.2) U2.9 33.7,40.2 35.1,38.8 v1(35.1,35.6)
SEG3: length 85.1
  TOP w0.2: U6.4 55.15,25.8 69.89,25.8 75.5,31.41 75.5,37.23 U7.3 ; U8.4 v1(23.44,37.06)
  BOTTOM w0.2: U6.4 49.45,20.1 42.7,20.1 41.5,21.3 41.5,22.87 35.77,28.6 35.77,39.73 34.03,41.48 27.86,41.48 v1(23.44,37.06)
SEG4: length 87.2
  TOP w0.2: U8.2 v1(20.56,37.06) ; U7.2 74.96,31.56 69.6,26.2 50.47,26.2 U6.2
  BOTTOM w0.2: v1(20.56,37.06) 22.46,37.06 28.14,42.74 U2.11 33.66,42.74 36.3,40.1 36.3,28.9 42.1,23.1 42.1,21.5 42.99,20.61 44.88,20.61 U6.2
SEG5: length 86.8
  TOP w0.2: U8.1 v1(19.12,36.98) ; U6.1 48.33,26.6 69.3,26.6 72.72,30.02 72.72,38.93 U7.1
  BOTTOM w0.2: v1(19.12,36.98) 19.74,37.6 22.2,37.6 28.61,44.02 U2.12 33.38,44.02 36.8,40.6 36.8,29.1 43.65,22.25 U6.1
SEG6: length 70.9
  TOP w0.2: U8.9 20.56,46.94 v1(20.5,47) ; v1(37.4,34.9) 37.5,35 45.81,35 U6.10 50.11,30.7 57,30.7 58.9,32.6 65.1,32.6 68.5,36 68.5,40.2 70.07,41.77 U7.10
  BOTTOM w0.2: v1(20.5,47) 22.23,45.27 U2.13 33.03,45.27 37.4,40.9 v1(37.4,34.9)
SEG7: length 90.5
  TOP w0.2: U7.4 76.1,35.29 76.1,31.3 70.1,25.3 57.19,25.3 U6.5 ; U8.10 v1(19.12,46.98)
  BOTTOM w0.2: U6.5 52.33,23.4 43.3,23.4 38.2,28.5 38.2,41.4 33.05,46.55 U2.14 21.96,46.55 20.8,47.7 19.84,47.7 v1(19.12,46.98)
SEG8: length 72.3
  TOP w0.2: U6.3 48.73,23.23 v1(49.6,24.1) ; U8.5 24.88,41.12 v1(22.8,43.2)
  BOTTOM w0.2: v1(49.6,24.1) 43.3,24.1 38.7,28.7 38.7,45.8 39.45,46.55 ; v1(22.8,43.2) 22.8,43.9 20.6,46.1 19,46.1 18.5,46.6 18.5,47.5 19.1,48.1 37.89,48.1 39.45,46.55 ; 39.45,46.55 U2.15
SPK+: length 41.1
  BOTTOM w0.5: U9.13 62.93,39.27 64,38.2 64,33.9 60.1,30 60.1,21.3 53.9,15.1 TP1.1 46.75,13.95 X3.6
SPK-: length 40.1
  BOTTOM w0.5: X3.5 45.25,14.85 TP2.1 47,16.6 54.2,16.6 59.2,21.6 59.2,30.3 63.1,34.2 63.1,37.3 62.41,37.99 U9.14
STB: length 11.2
  BOTTOM w0.2: U5.8 24.07,34.38 25,35.3 28.8,35.3 29.5,34.6 C8.2 29.66,33.86 31.8,33.86
TXD: length 11.4
  BOTTOM w0.2: U5.14 22.8,24.31 23.9,25.4 29.6,25.4 30.2,24.8 X5.2
VOUT_3V3: length 9.6
  BOTTOM w0.5: C35.2 64.15,43.15 C36.1 63.92,43.08 59.7,43.08 59,43.77 R47.2
N17327339: length 8.2
  TOP w0.2: SW1.3 v1(5.3,40.75) SW1.4
  BOTTOM w0.2: R36.2 v1(5.3,40.75)
N17337672: length 2.7
  BOTTOM w0.2: R30.1 70.15,30.2 U4.3
N17354367: length 5.3
  TOP w0.2: v1(62.35,13.4) 62.3,13.35 R20.2
  BOTTOM w0.2: TP13.1 62.35,13.55 v1(62.35,13.4) X4.2
N17360659: length 8.2
  TOP w0.2: SW2.3 v1(5.3,29.25) SW2.4
  BOTTOM w0.2: R37.1 v1(5.3,29.25)
N17360860: length 8.2
  TOP w0.2: SW3.4 v1(5.3,17.75) SW3.3
  BOTTOM w0.2: R38.1 v1(5.3,17.75)
N17361075: length 9.6
  TOP w0.2: v1(46.25,19.05) SW4.4 SW4.3
  BOTTOM w0.2: v1(46.25,19.05) 46.2,19.1 R39.1
N17361306: length 8.2
  TOP w0.2: SW5.3 v1(91.3,40.75) SW5.4
  BOTTOM w0.2: R40.1 v1(91.3,40.75)
N17361550: length 8.2
  TOP w0.2: SW6.4 v1(91.3,29.25) SW6.3
  BOTTOM w0.2: R41.1 v1(91.3,29.25)
N17361802: length 8.2
  TOP w0.2: SW7.4 v1(91.3,17.75) SW7.3
  BOTTOM w0.2: R44.1 v1(91.3,17.75)
N17363842: length 3.2
  BOTTOM w0.2: K2.G 61.8,25.7 R18.1 R19.2
N17363844: length 2.5
  BOTTOM w0.2: K3.C 64.4,30.1 R19.1
N17363852: length 2.1
  BOTTOM w1: R16.1 K2.D
N17363856: length 2.4
  BOTTOM w0.2: R22.2 R21.1 K3.B
N17376750: length 2.4
  BOTTOM w0.2: R3.1 13.2,37.88 X1.4
N17379186: length 6.6
  BOTTOM w0.2: X2.3 31.2,14.4 TP19.1 31.4,15.6 R34.2
N17379194: length 6.3
  BOTTOM w0.2: 29.7,11.04 29.7,15.1 TP18.1 30.2,15.6 R35.2
N17379605: length 2.4
  BOTTOM w0.2: R32.2 LED52.1
N17379623: length 2.8
  BOTTOM w0.2: LED53.1 23.1,15.63 R33.2
N17382684: length 1.7
  BOTTOM w0.2: R8.2 K1.B
N17382715: length 7.7
  BOTTOM w0.2: X3.1 39.25,13.05 TP6.1 R8.1 R9.2
N17382789: length 5.9
  BOTTOM w0.2: X3.4 43.75,14.95 TP3.1 R6.2
N17383671: length 5.9
  BOTTOM w0.5: U9.11 63.99,41.8 C32.1 65.05,41.7 C34.2 65.26,41.61 F2.1
N17392841: length 2
  BOTTOM w0.5: R47.1 R46.2 C37.1

## Copper pours and planes (outline as drawn; the poured copper is in the pictures)
GND on TOP, BOTTOM: 99.6,5.4 0.4,5.4 0.4,48.6 99.6,48.6
VDD_5VDC on BOTTOM: 74.8,13.68 74.8,17 75.47,17.67 77.25,17.67 77.6,18.02 77.6,24.72 77.35,24.97 74.67,24.97 72.47,22.77 72.47,17.23 72.7,17 72.7,14.17 71.3,12.77 71.3,10.18

## Text on the board
Ref Des/Silkscreen Bottom: GND | LED_G | LED_R | IR_DET | 3V3 | IR_LED | SPK- | SPK+ | M_DET | VDD_M | BAT | 5V
Ref Des/Silkscreen Top: SET_KEY | UP_KEY | DOWN_KEY | BAT_LED | F12-F018-MAIN-V1 | 2021-12-23 | TIME_KEY | FOOD_LED | FEED_KEY | SPK_KEY | REC_KEY
DEVICE_TYPE_TOP: FIGURE | SIZE | 0.305 | 0.5 | 0.55 | 0.6 | 0.7 | 0.9 | 1.0 | DRILL CHART: TOP to BOTTOM | ALL UNITS ARE IN MILLIMETERS | PLATED | QTY | 211 | 5 | 1 | 2 | 4 | 22
